# Altium PCB Ampli2.PcbDoc
Units mm, origin at the board's own origin, x right, y up, seen from the top; angles counter-clockwise.
Board outline 30 x 60 mm, 2 copper layers (Top Layer, Bottom Layer); 41 components, 26 nets, 89 pads, 5 vias.
Unrouted connection lines stored in the file: 4.
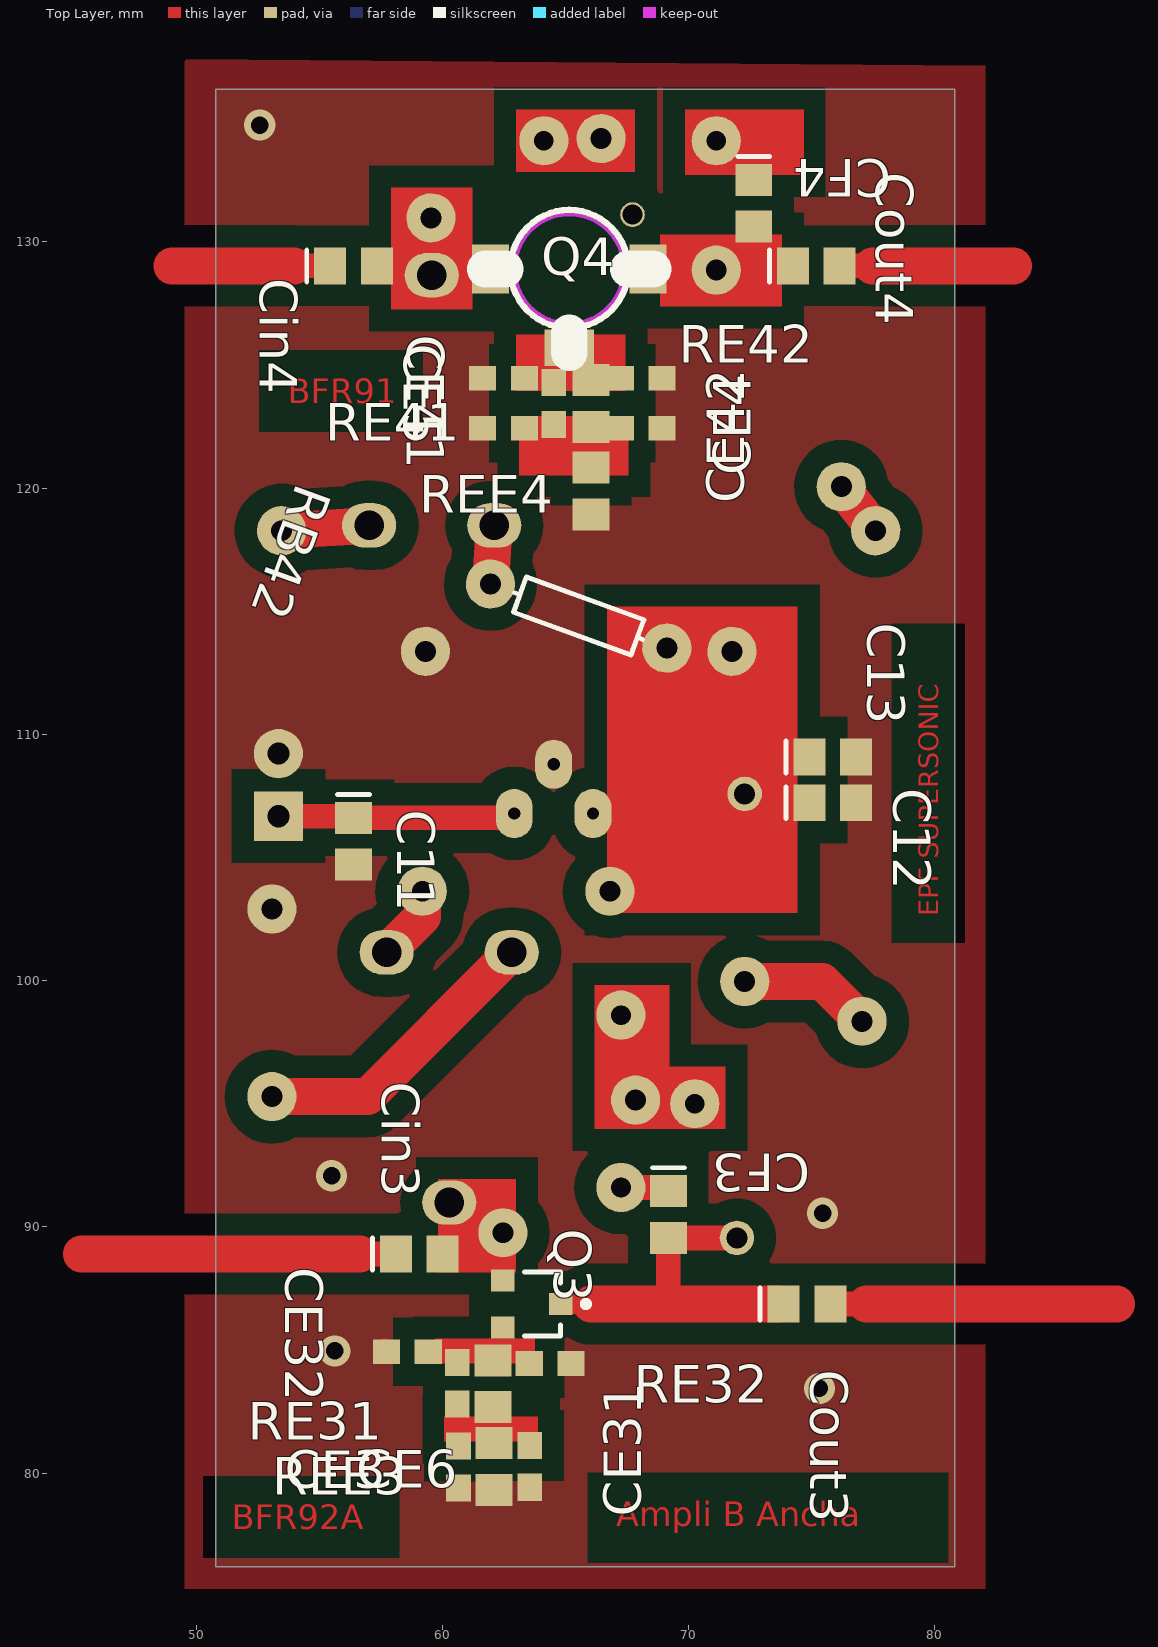
[diagram p0: Top Layer view]
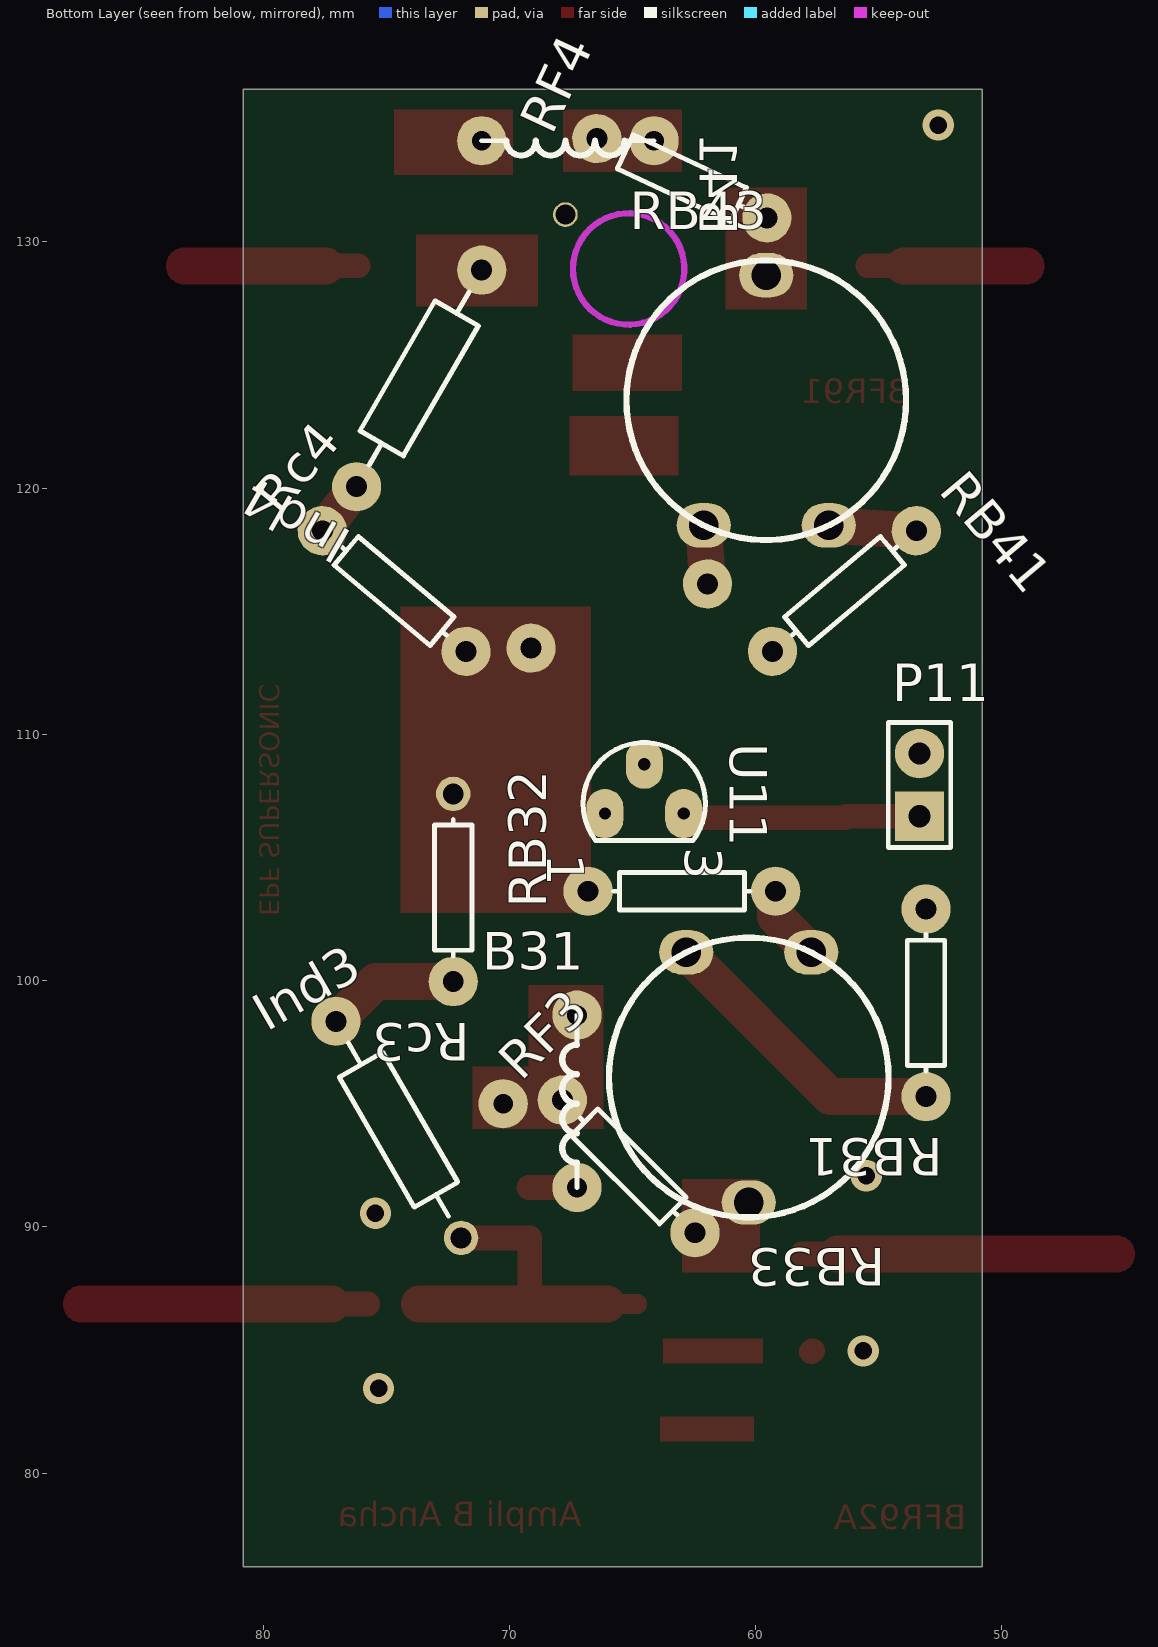
[diagram p1: Bottom Layer view, seen from below]

## Layer stack, top to bottom
Top Layer: signal copper 0.0356
Dielectric: dielectric 0.32, FR-4, Dk 4.8
Bottom Layer: signal copper 0.0356

## Board outline
50.8,76.2 80.8,76.2 80.8,136.2 50.8,136.2

## Design rules (kind name [scope] priority, off if disabled: settings)
Clearance [All] p1: gap=0.9
ComponentClearance [All] p1: gap=0.254 collisioncheckmode=3 verticalgap=0.254
PlaneConnect [All] p1: planeconnectstyle=Direct reliefexpansion=0.508 reliefentries=4 reliefconductorwidth=0.254 reliefairgap=0.254
PolygonConnect [All] p1: connectstyle=Direct reliefconductorwidth=0.254 reliefentries=4 polygonreliefangle="90 Angle"
RoomDefinition Alimentacion [InComponentClass('Alimentacion')] p1: confinementstyle=ConfineIn formatcopy=TRUE lockcomponents=FALSE outline 51.435,102.108 80.137,102.108 80.137,111.506 51.435,111.506
RoomDefinition Ampli3 [InComponentClass('Ampli3')] p2: confinementstyle=ConfineIn formatcopy=TRUE lockcomponents=FALSE outline 51.308,76.835 80.264,76.835 80.264,109.728 51.308,109.728
RoomDefinition Ampli4 [InComponentClass('Ampli4')] p3: confinementstyle=ConfineIn formatcopy=TRUE lockcomponents=TRUE outline 51.435,110.109 80.137,110.109 80.137,135.509 51.435,135.509
RoutingVias [All] p1: holewidth=0.7 width=2 viastyle="Through Hole" minholewidth=0.7 minwidth=1.27 maxholewidth=0.711 maxwidth=3
SolderMaskExpansion [All] p1: expansion=0.102
TestPointUsage [All] p1: valid=0 allowmultiple=FALSE
Testpoint [All] p1: side=15 testpointundercomponent=TRUE minsize=1.016 maxsize=2.54 preferedsize=1.524 minholesize=0 maxholesize=1.016 preferedholesize=0.813 testpointgrid=0.025 style=1023 order=0-112345678
Width [All] p1: maxlimit=4 minlimit=0.3 preferedwidth=1
17 further rules are at their usual default settings.

## Classes and differential pairs
component class Alimentacion: C11 C12 C13 P11 U11
component class Ampli3: B31 CE3 CE31 CE32 CF3 Cin3 Cout3 Ind3 Jin3 Pout3 Q3 RB31 RB32 RB33 Rc3 RE31 RE32 REE3 RF3
component class Ampli4: B41 CE4 CE41 CE42 CEE42 CF4 Cin4 Cout4 Ind4 Jin4 Pout4 Q4 RB41 RB42 RB43 Rc4 RE41 RE42 REE4 RF4

## Components (designator, comment, footprint, x,y, rotation, side; value= is the part's Value field where it differs from the comment)
B31 "Ind3" "Ind 7mm"#1 67.25,91.6 r90 bottom
B41 "Ind3" "Ind 7mm"#2 71.12,134.112 r180 bottom
C11 "Cap Pol3" C0805 56.388,105.664 r270 top
C12 "Cap Pol3" C0805 75.85,107.225 r0 top
C13 "Cap Pol3" C0805 75.85,109.075 r0 top
CE3 "Cap Semi" 1608[0603] 60.65,80.25 r90 top
CE4 "Cap Semi" 1608[0603] 68.072,122.428 r180 top
CE5 "Cap Semi" 1608[0603] 62.484,122.428 r0 top (schematic designator CE4)
CE6 "Cap Semi" 1608[0603] 63.55,80.275 r90 top (schematic designator CE3)
CE31 "Cap Semi" 1608[0603] 64.375,84.45 r180 top
CE32 "Cap Semi" 1608[0603] 58.575,84.925 r0 top
CE41 "Cap Semi" 1608[0603] 62.484,124.46 r0 top
CE42 "Cap Semi" 1608[0603] 68.072,124.46 r180 top
CF3 "Cap Pol3" C0805 69.175,90.5 r270 top
CF4 "Cap Pol3" C0805 72.644,131.572 r270 top
Cin3 "Cap Pol3" C0805 59.055,88.9 r0 top
Cin4 "Cap Pol3" C0805 56.388,129.032 r0 top
Cout3 "Cap Pol3" C0805 74.803,86.868 r0 top
Cout4 "Cap Pol3" C0805 75.184,129.032 r0 top
Ind3 "Res2" AXIAL-0.4#1 74.5,93.95 r60 bottom
Ind4 "Res2" AXIAL-0.4#2 73.66,124.46 r300 bottom
P11 "Alimentacion" HDR1X2 53.34,106.68 r90 bottom
Q3 "BFR92A" SOT23 63.627,86.868 r270 top
Q4 "BFR91A" SOT-37_short 65.151,128.905 r0 top
RB31 "Res1" AXIAL-0.3#1 53.075,99.1 r270 bottom
RB32 "Res1" AXIAL-0.3#1 62.992,103.632 r0 bottom
RB33 "Pot" Potenciometro 60.275,101.15 r0 bottom
RB41 "Res1" AXIAL-0.3#1 56.388,115.824 r140 bottom
RB42 "Res1" AXIAL-0.3#1 65.532,114.808 r340 top
RB43 "Pot" Potenciometro 59.563,118.491 r180 bottom
Rc3 "Res1" AXIAL-0.3#2 72.275,103.775 r270 bottom
Rc4 "Res1" AXIAL-0.3#1 74.676,115.824 r40 bottom
RE31 "Res Semi" 1608[0603] 60.6,83.65 r90 top
RE32 "Res Semi" 2012[0805] 62.05,83.625 r90 top
RE41 "Res Semi" 1608[0603] 64.516,123.444 r90 top
RE42 "Res Semi" 2012[0805] 66.04,123.444 r90 top
REE3 "Res Semi" 2012[0805] 62.103,80.264 r90 top
REE4 "Res Semi" 2012[0805] 66.04,119.888 r90 top
RF3 "Res1" AXIAL-0.3#1 65.151,92.456 r45 bottom
RF4 "Res1" AXIAL-0.3#1 62.992,132.588 r25 bottom
U11 "MC78L08ABP" TO92 64.516,107.188 r270 bottom

## Footprints (in the part's own frame and the unit in brackets; to place one, negate y for a bottom-side part, rotate by r counter-clockwise, add the part's x,y. Pads: shape width x height; smd on the part's side, far side on the other; paste and mask are expansions set on the pad)
1608[0603] [mm] "Chip Capacitor; Body 1.6 x 0.8 mm (LxW typ)"
  rect 1.1x1 smd: 1(-0.85,0) 2(0.85,0)
2012[0805] [mm] "Chip Resistor; Body 2.0 x 1.3 mm (LxW typ)"
  rect 1.3x1.5 smd: 1(-0.95,0) 2(0.95,0)
AXIAL-0.3#1 [mm] "Resistor; 2 Leads"
  round 2 hole 0.85: 1(-3.81,0) 2(3.81,0)
  silkscreen extent -2.77,-0.76 2.77,0.76
AXIAL-0.3#2 [mm] "Resistor; 2 Leads"
  round 1.4 hole 0.85: 1(-3.81,0)
  round 2 hole 0.85: 2(3.81,0)
  silkscreen extent -2.77,-0.76 2.77,0.76
AXIAL-0.4#1 [mm] "Resistor; 2 Leads"
  round 1.4 hole 0.85: 1(-5.08,0)
  round 2 hole 0.85: 2(5.08,0)
  silkscreen extent -4.06,-1.02 4.06,1.02
AXIAL-0.4#2 [mm] "Resistor; 2 Leads"
  round 2 hole 0.85: 1(-5.08,0) 2(5.08,0)
  silkscreen extent -4.06,-1.02 4.06,1.02
C0805 [mm] "Chip Capacitor; Body 2.0 x 1.2 mm (LxW typ)"
  rect 1.3x1.5 smd: 1(-0.95,0) 2(0.95,0)
  silkscreen extent -1.9,-0.65 -1.9,0.65
HDR1X2 [mm] "Connector; Header; 2 Position"
  rect 2x2 hole 0.9: 1(0,0)
  round 2 hole 0.9: 2(2.54,0)
  silkscreen extent -1.27,-1.27 3.81,1.27
"Ind 7mm"#1 [mm]
  round 2 hole 0.8: 0(7,0) 1(0,0) 2(3.4,3)
  silkscreen extent 0,0 7,0.6
"Ind 7mm"#2 [mm]
  round 2 hole 0.8: 0(7,0) 1(0,0)
  round 1 hole 0.8: 2(3.4,-3)
  silkscreen extent 0,-0.6 7,0
Potenciometro [mm]
  oval 2.2x1.8 hole 1.2: 1(-2.54,0) 2(2.54,0) 3(0,10.16)
  silkscreen extent -5.68,-0.6 5.68,10.76
SOT23 [mm] "SOT-23; 3 Leads; Body 3.1 x 2.5 mm, inc. leads (LxW max), Alternate Lead Configuration"
  rect 0.9x0.95 smd: 1(0,1.175) 2(0.95,-1.175) 3(-0.95,-1.175)
  silkscreen extent -1.3,-0.3 1.3,2.33
SOT-37_short [mm] "Recortado"
  rect 1.5x2 smd: 0(-3.2,0) 2(3.2,0)
  rect 2x1.5 smd: 1(0,-3.2)
  Keep-Out Layer circle w0.254: c0,0 r2.263
  silkscreen extent -3.4,-3.4 3.4,2.4
TO92 [mm] "TO, Flat Index; 3 In-Line, Axial Leads; Body Dia. 4.8mm; Leads 0.48 x 0.5 mm (max)"
  oval 2x1.5 hole 0.5: 1(0.4,-1.6) 2(-1.6,0) 3(0.4,1.6)
  silkscreen extent -2.48,-2.48 1.5,2.48

## Part data
C11 C12 C13 CF3 CF4 Cin3 Cin4 Cout3 Cout4: "Polarized Capacitor (Surface Mount)"
CE3 CE4 CE5 CE6 CE31 CE32 CE41 CE42: "Capacitor (Semiconductor SIM Model)"
Ind3 Ind4 RB31 RB32 RB41 RB42 Rc3 Rc4 RF3 RF4: "Resistor"
P11: library part "Header 2", "Header, 2-Pin"
Q3: "NPN 5 GHz Wideband Transistor"
Q4: library part BFR92A, "NPN 5 GHz Wideband Transistor"
RE31 RE32 RE41 RE42 REE3 REE4: "Semiconductor Resistor"
U11: "3-Terminal Low-Current Positive Fixed Voltage Regulator"

## Via types
v1: diameter 1.27, hole 0.711, Top Layer to Bottom Layer, 5 vias

## Nets (pads, with @x,y where several pads share a name; then routed paths per layer and width w, separated by ;. In a path a pad name is that pad's centre, name@x,y a point inside that pad or via, vN(x,y) a via of type N, cw(c..) or ccw(c..) an arc to the next point about the centre after c; other vN are vias at no path point)
8V: RB32.2 RB42.2 Rc3.1 Rc4.1 | length 2.6
  Top Layer w1.5: RB42.2 Rc4.1
BASE3: Cin3.2 Q3.3 RB33.3 RF3.1
BASE4: Cin4.2 Q4.0 RB43.3 RF4.1
COLECTOR3: CF3.2 Cout3.1 Ind3.1 Q3.1 | length 14.3
  Top Layer w0.8: Q3.1 66.04,86.868
  Top Layer w1: 69.175,86.908 CF3.2 Ind3.1@71.959,89.55
  Top Layer w1.5: 66.04,86.868 Cout3.1@73.653,86.868
COLECTOR4: CF4.2 Cout4.1 Ind4.1 Q4.2
EMISOR3: CE31.2 CE32.2 Q3.2 RE31.2 RE32.2
EMISOR4: CE41.2 CE42.2 Q4.1 RE41.2 RE42.2
GND: C11.2 C12.2 C13.2 CE3.1 CE4.1 CE5.1 CE6.1 CE31.1 CE32.1 CE41.1 CE42.1 P11.2 RB31.1 RB41.1 REE3.1 REE4.1 U11.2 | length 0.1
  Top Layer w1: CE32.1@57.675,84.975 CE32.1
  other v1: 75.311,83.439 55.626,84.963 75.438,90.551 55.499,92.075 52.578,134.747
NetB31_0: B31.0 B31.2 RF3.2
NetB31_1: B31.1 CF3.1 | length 1.9
  Top Layer w1: B31.1 CF3.1@69.2,91.6
NetB41_0: B41.0 RF4.2
NetB41_1: B41.1 CF4.1
NetC11_1: C11.1 P11.1 U11.3 | length 9.6
  Top Layer w1: P11.1 C11.1@56.322,106.68 ; C11.1 62.742,106.614 U11.3
NetC12_1: C12.1 C13.1 U11.1
NetCE3_2: CE3.2 CE6.2 RE31.1 RE32.1 REE3.2
NetCE4_2: CE4.2 CE5.2 RE41.1 RE42.1 REE4.2
NetCin3_1: Cin3.1 | length 13.1
  Top Layer w1: 56.261,88.9 Cin3.1
  Top Layer w1.5: 45.339,88.9 56.642,88.9
NetCin4_1: Cin4.1 | length 6.4
  Top Layer w1: 53.975,129.032 Cin4.1
  Top Layer w1.5: 49.022,129.032 53.975,129.032
NetCout3_2: Cout3.2 | length 11.6
  Top Layer w1: Cout3.2 77.216,86.868
  Top Layer w1.5: 77.216,86.868 87.376,86.868
NetCout4_2: Cout4.2 | length 7.1
  Top Layer w1: Cout4.2 77.47,129.032
  Top Layer w1.5: 77.47,129.032 83.185,129.032
NetInd3_2: Ind3.2 Rc3.2 | length 5.4
  Top Layer w1.5: Rc3.2 75.424,99.965 Ind3.2
NetInd4_2: Ind4.2 Rc4.2 | length 2.3
  Top Layer w1.5: Ind4.2 Rc4.2
NetRB31_2: RB31.2 RB33.2 | length 12.2
  Top Layer w1.5: RB31.2 56.955,95.29 RB33.2
NetRB32_1: RB32.1 RB33.1 | length 3.1
  Top Layer w1.5: RB33.1 59.182,102.597 RB32.1
NetRB41_2: RB41.2 RB43.2 | length 3.6
  Top Layer w1.5: RB41.2 RB43.2
NetRB42_1: RB42.1 RB43.1 | length 2.4
  Top Layer w1.5: RB42.1 RB43.1
pads on no net: B41.2

## Polygon pours and split planes (outlines as drawn)
GND on Top Layer (solid, remove dead copper): 49.53,137.414 49.53,75.311 82.042,75.311 82.042,137.16

## Other copper
Top Layer:
  rectangle net EMISOR4: 62.992,123.952 67.437,126.238
  rectangle net NetCE4_2: 63.119,120.523 67.564,122.936
  rectangle net BASE4: 57.912,127.254 61.214,132.207
  rectangle net NetB41_0: 62.992,132.842 67.818,135.382
  rectangle net COLECTOR4: 68.834,127.381 73.787,130.302
  rectangle net NetB41_1: 69.85,132.715 74.676,135.382
  rectangle net NetC12_1: 66.675,102.743 74.422,115.189
  rectangle net BASE3: 59.817,88.138 62.992,91.948
  rectangle net EMISOR3: 59.69,84.455 63.754,85.471
  rectangle net NetCE3_2: 60.071,81.28 63.881,82.296
  rectangle net NetB31_0: 66.167,93.98 69.215,99.822
  rectangle net NetB31_0: 68.961,93.98 71.501,96.52
  text "BFR91" at 53.721,123.444 h1
  text "EPF SUPERSONIC" at 80.137,102.616 h0.8 r90
  text "Ampli B Ancha" at 67.056,77.851 h1
  text "BFR92A" at 51.435,77.724 h1

## Silkscreen, mask and mechanical layers (free items; w line width, h text height)
Drill Drawing:
  text ".LEGEND" at 85.88,81.28 h1.52
  text "Drill Drawing." at 85.725,78.74 h1.52

## Text inside footprints (layer, text, board x,y; h text height)
U11: Bottom Overlay "3" at 62.865,105.41 h1.5 r90; Bottom Overlay "1" at 68.453,105.156 h1.5 r90